# EAGLE board SlaveNode (EAGLE 9.4.2)
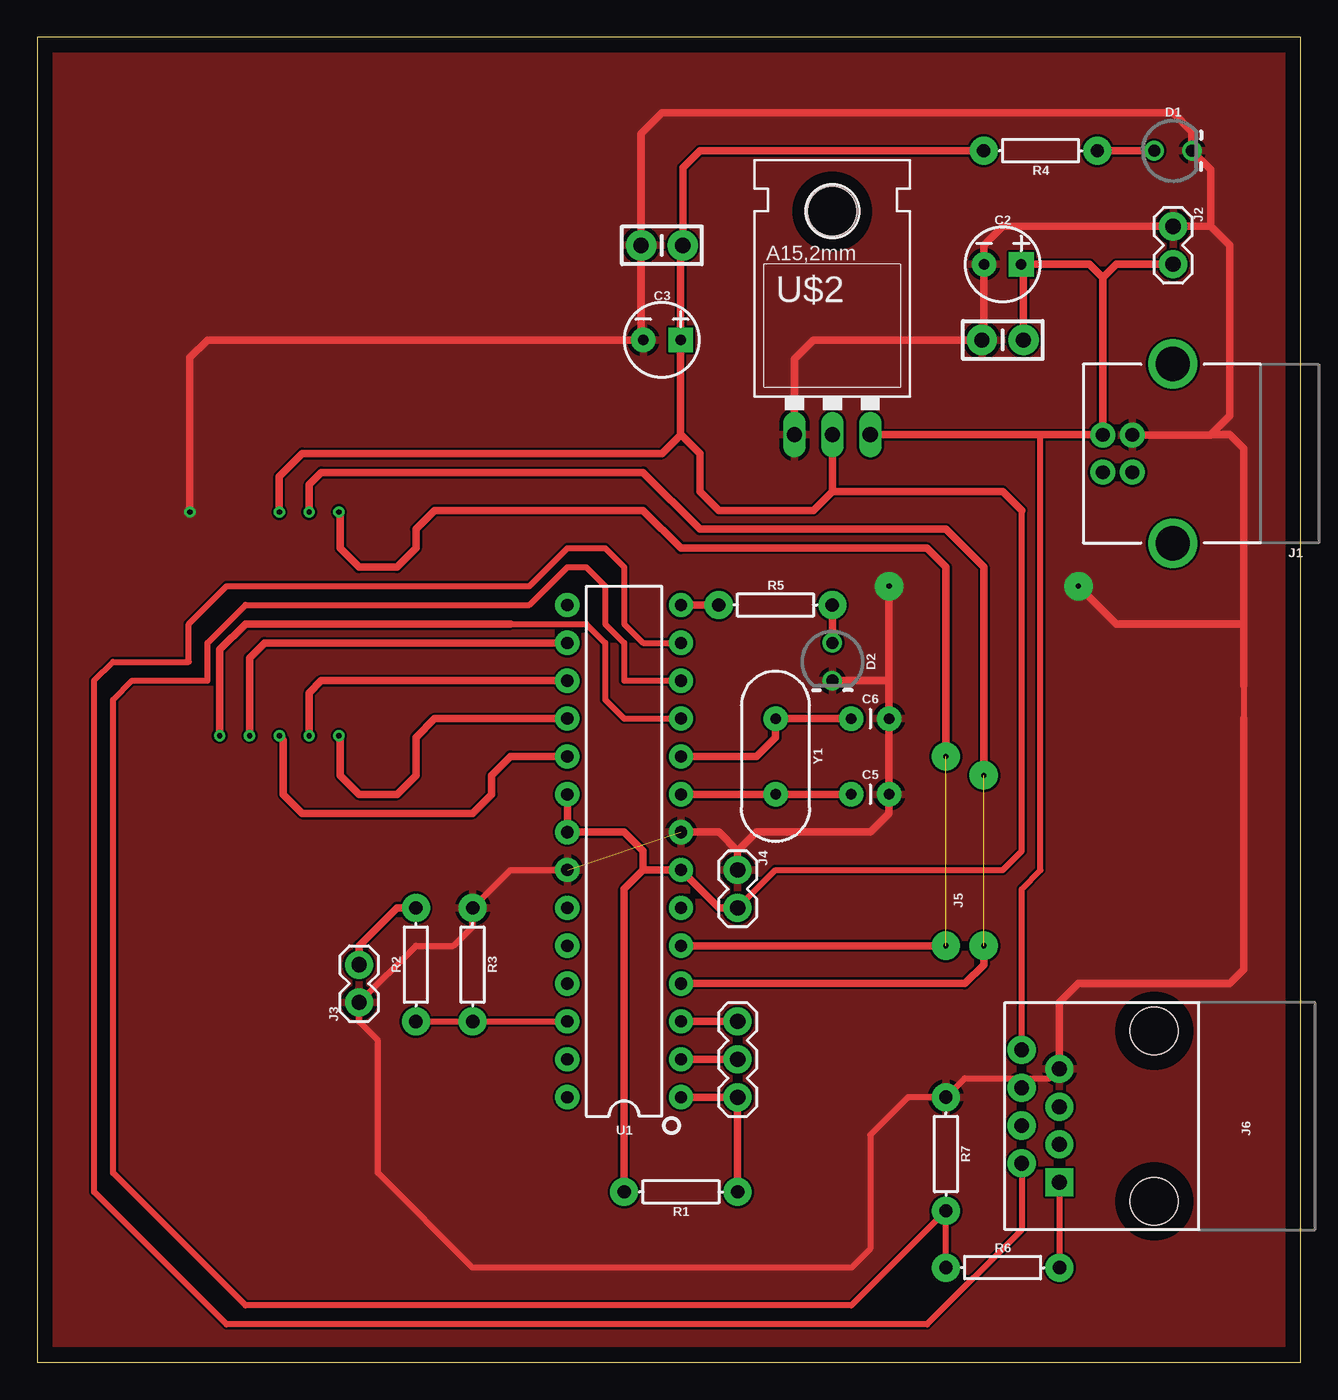
[diagram p0: board, top side]
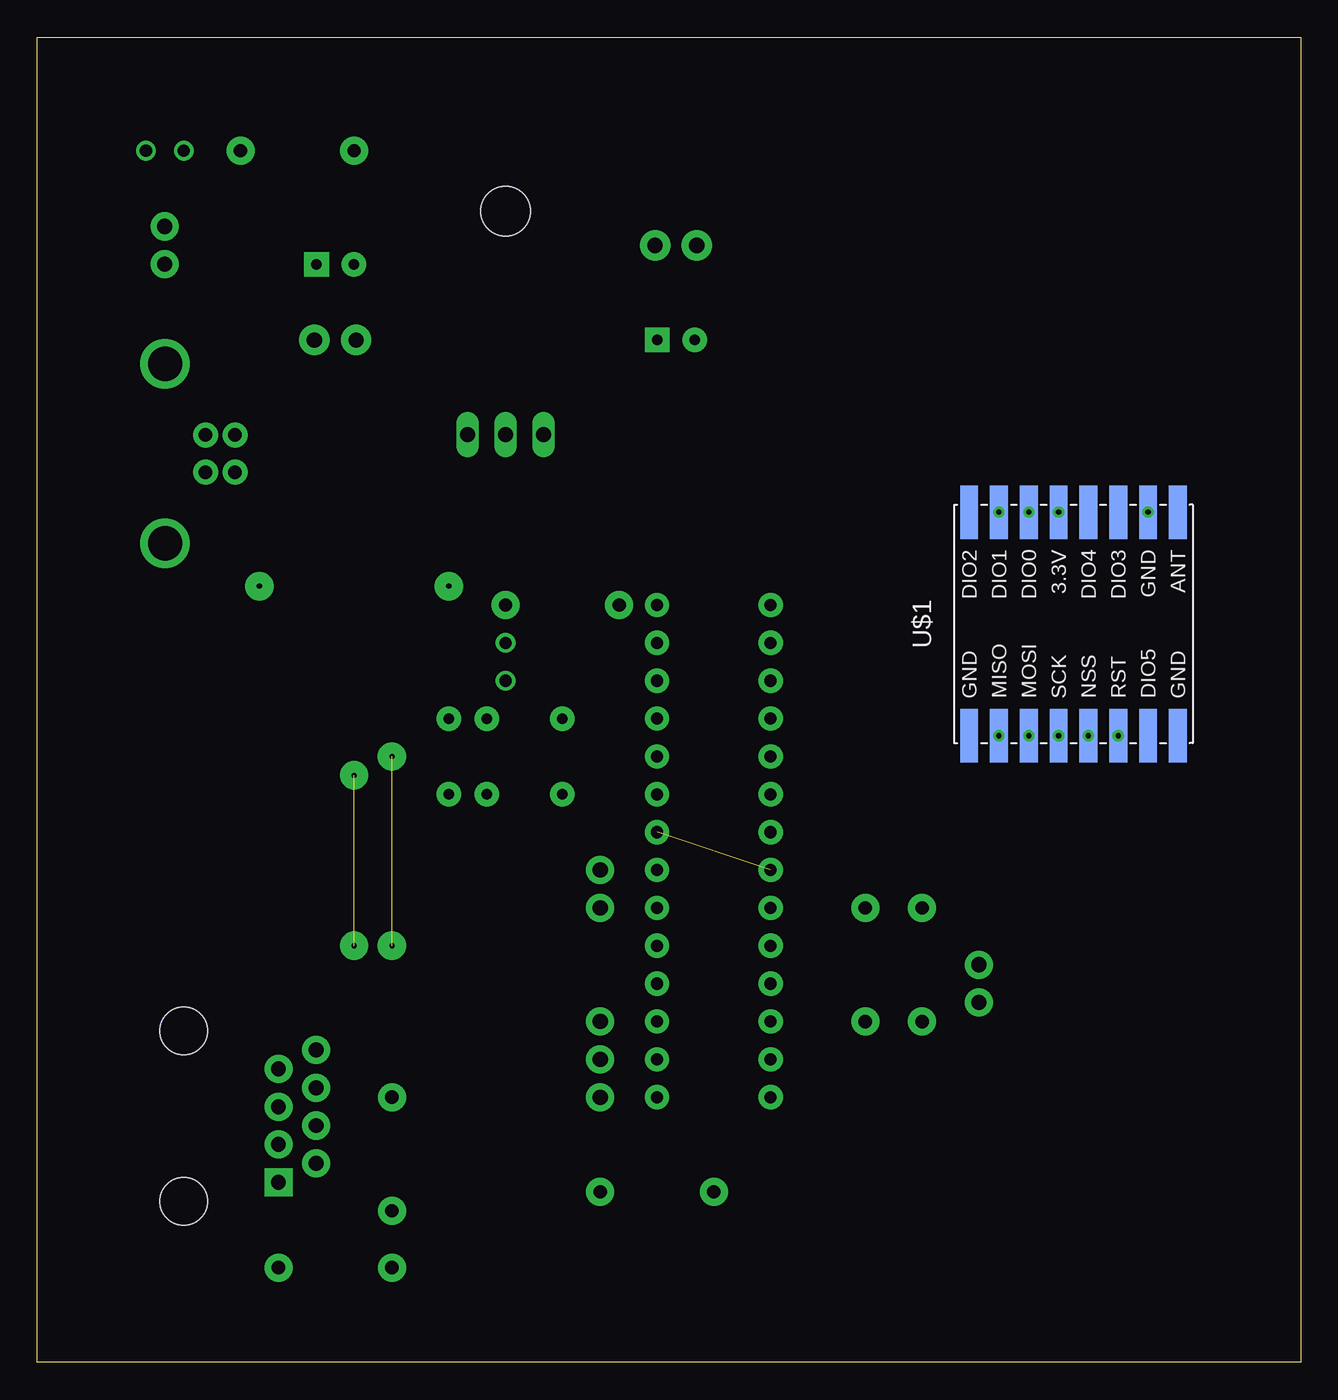
[diagram p1: board, bottom side, seen from below]

Size 84.76 x 88.89 mm. Coordinates in mm from the lower left corner, seen from the top.
Outline: 0,0 84.76,0 84.76,88.89 0,88.89 0,0
Copper layers (1*16): Top 0.035mm / dielectric 1.5mm / Bottom 0.035mm
Design rules "default": minimum track width 6mil, minimum drill 0.35mm, track to track 6mil, track to pad 6mil, pad to pad 6mil, via to via 6mil, smd to smd 6mil, copper to edge 40mil, drill to drill 6mil, minimum pad ring 10mil, minimum via ring 8mil, stop-mask expansion 4mil, vias tented up to drill 0mil, thermal gap 10mil

## Footprints (pad centres in the part's own frame; a part is rotated, then mirrored left to right if it is on the bottom)
CAP-PTH-SMALL-KIT = drill 1.016 pad 2.032: 1 -1.397,0; 2 1.397,0
CPOL-RADIAL-2.5MM-5MM = drill 0.7 pad 1.651 square: 1 1.25,0 | drill 0.7 pad 1.651: 2 -1.25,0
CAP-PTH-2.54 = drill 0.7 pad 1.651: 1 -1.27,0; 2 1.27,0
LED_3MM-NS = drill 0.813: A -1.27,0; K 1.27,0
USB-B-PTH = drill 0.914 pad 1.676: D+ 4,1.25; D- 5.981,1.25; GND 4,-1.25; VBUS 5.981,-1.25 | drill 2.286: SHLD1 1.282,-6.02; SHLD2 1.282,6.02
1X02 = drill 1.016 pad 1.88: 1 0,0; 2 2.54,0
1X03 = drill 1.016 pad 1.88: 1 0,0; 2 2.54,0; 3 5.08,0
RJ45-8 = drill 1 pad 1.88 square: 1 -4.445,6.35 | drill 1 pad 1.88: 2 -3.175,8.89; 3 -1.905,6.35; 4 -0.635,8.89; 5 0.635,6.35; 6 1.905,8.89; 7 3.175,6.35; 8 4.445,8.89 | hole 3.2: -5.715,0; 5.715,0
AXIAL-0.3 = drill 0.9 pad 1.88: P$1 -3.81,0; P$2 3.81,0
DIP28 = drill 0.813 pad 1.626: 1 -16.51,-3.81; 2 -13.97,-3.81; 3 -11.43,-3.81; 4 -8.89,-3.81; 5 -6.35,-3.81; 6 -3.81,-3.81; 7 -1.27,-3.81; 8 1.27,-3.81; 9 3.81,-3.81; 10 6.35,-3.81; 11 8.89,-3.81; 12 11.43,-3.81; 13 13.97,-3.81; 14 16.51,-3.81; 15 16.51,3.81; 16 13.97,3.81; 17 11.43,3.81; 18 8.89,3.81; 19 6.35,3.81; 20 3.81,3.81; 21 1.27,3.81; 22 -1.27,3.81; 23 -3.81,3.81; 24 -6.35,3.81; 25 -8.89,3.81; 26 -11.43,3.81; 27 -13.97,3.81; 28 -16.51,3.81
WIRELESS-LORA-RFM95W#SMD = smd 3.6 x 1.2: A1 -7.5,7; A2 -7.5,5; A3 -7.5,3; A4 -7.5,1; A5 -7.5,-1; A6 -7.5,-3; A7 -7.5,-5; A8 -7.5,-7; B1 7.5,7; B2 7.5,5; B3 7.5,3; B4 7.5,1; B5 7.5,-1; B6 7.5,-3; B7 7.5,-5; B8 7.5,-7
78XXL = drill 1.016 long: GND 0,-3.81; IN -2.54,-3.81; OUT 2.54,-3.81 | hole 3.302: 0,11.176
HC49US = drill 0.7 pad 1.651: 1 -2.54,0; 2 2.54,0

## Placement (x,y rotation side)
C1  0.1uF  [CAP-PTH-SMALL-KIT]  64.77,68.58 180 top
C2  10uF  [CPOL-RADIAL-2.5MM-5MM]  64.77,73.66 0 top
C3  10uF  [CPOL-RADIAL-2.5MM-5MM]  41.91,68.58 0 top
C4  0.1uF  [CAP-PTH-SMALL-KIT]  41.91,74.93 180 top
C5  22pF  [CAP-PTH-2.54]  55.88,38.1 0 top
C6  22pF  [CAP-PTH-2.54]  55.88,43.18 0 top
D1  [LED_3MM-NS]  76.2,81.28 0 top
D2  [LED_3MM-NS]  53.34,46.99 270 top
J1  USB_B_PTH  [USB-B-PTH]  77.47,60.96 180 top
J2  [1X02]  76.2,76.2 270 top
J3  [1X02]  21.59,24.13 90 top
J4  [1X02]  46.99,33.02 270 top
J5  [1X03]  46.99,17.78 90 top
J6  RJ45  [RJ45-8]  74.93,16.51 90 top
R1  10k  [AXIAL-0.3]  43.18,11.43 180 top
R2  100k  [AXIAL-0.3]  25.4,26.67 90 top
R3  18k  [AXIAL-0.3]  29.21,26.67 270 top
R4  1k  [AXIAL-0.3]  67.31,81.28 180 top
R5  1k  [AXIAL-0.3]  49.53,50.8 0 top
R6  1k  [AXIAL-0.3]  64.77,6.35 0 top
R7  2k  [AXIAL-0.3]  60.96,13.97 270 top
U1  328P  [DIP28]  39.37,34.29 90 top
U$1  WIRELESS-LORA-RFM95W#SMD  [WIRELESS-LORA-RFM95W#SMD]  15.24,49.53 90 bottom
U$2  V_REG_LD1117VXX  [78XXL]  53.34,66.04 0 top
Y1  16MHz  [HC49US]  49.53,40.64 270 top

## Library data of the parts
C1 C4 = SparkFun-Capacitors; PROD_ID: CAP-08370
C2 C3 = SparkFun-Capacitors; PROD_ID: CAP-08440
C5 C6 = SparkFun-Capacitors; PROD_ID: CAP-09128
D1 D2 = SparkFun-LED
J1 = SparkFun-Connectors; PROD_ID: CONN-08278; SF_ID: PRT-00139
J2-J5 = SparkFun-Connectors
J6 = SparkFun-Connectors; PROD_ID: CONN-08506; SF_ID: PRT-00643
R1 = SparkFun-Resistors; PROD_ID: RES-12183
R2 R3 R6 R7 = SparkFun-Resistors; PROD_ID: RES-12184
R4 R5 = SparkFun-Resistors; PROD_ID: RES-12182
U1 = SparkFun-IC-Microcontroller; PROD_ID: IC-09136
U$1 = diy-modules
U$2 = SparkFun-IC-Power
Y1 = SparkFun-Clocks; PROD_ID: XTAL-08181; SF_ID: COM-00536

## Nets
+3V3: C3.1 C4.1 J4.2 R1.P$2 R4.P$2 U1.7 U1.20 U1.21 U$1.B4 U$2.GND
+5V: C1.1 C2.1 J1.VBUS J2.2 J6.8 U$2.OUT
+12V: J3.2 R2.P$2
GND: C1.2 C2.2 C3.2 C4.2 C5.2 C6.2 D1.K D2.K J1.GND J2.1 J3.1 J4.1 J6.7 R3.P$1 R7.P$1 U1.8 U1.22 U$1.B7 U$2.IN
GND.1: U$1.A1
GND.2: U$1.A8
N$1: R2.P$1 R3.P$2 U1.26
N$2: D1.A R4.P$1
N$3: J5.1 R1.P$1 U1.1
N$4: U1.19 U$1.A4
N$5: U1.18 U$1.A2
N$6: C5.1 U1.9 Y1.2
N$7: C6.1 U1.10 Y1.1
N$8: J5.2 U1.2
N$9: J5.3 U1.3
N$10: U1.17 U$1.A3
N$11: U1.16 U$1.A5
N$12: U1.11 U$1.A6
N$13: U1.4 U$1.B3
N$14: U1.5 U$1.B2
N$15: J6.2 U1.13
N$16: R6.P$1 R7.P$2 U1.12
N$22: R5.P$1 U1.14
N$23: D2.A R5.P$2
N$24: J6.1 R6.P$2

## Tracks (layer width: path | path; a pad name or v marks a point on that pad's centre or on a via)
+3V3  (via drill 0.35)
  Top 0.406: J4.2 49.53,33.02 64.77,33.02 66.04,34.29 66.04,57.15
  Top 0.508: R4.P$2 44.45,81.28 43.31,80.14 C4.1 43.16,74.78 C3.1 43.16,62.21 | R1.P$2 39.37,31.75 40.64,33.02 | 40.64,33.02 U1.7 45.72,30.48 J4.2 | U1.20 U1.21 39.37,35.56 40.64,34.29 40.64,33.02 | U$2.GND 53.34,58.42 | U$1.B4 16.24,59.42 17.78,60.96 41.91,60.96 43.16,62.21 | 43.16,62.21 43.18,62.23 44.45,60.96 44.45,58.42 45.72,57.15 52.07,57.15 53.34,58.42 | 66.04,57.15 64.77,58.42 53.34,58.42
  other vias: 16.24,57.03
+5V
  Top 0.406: 67.31,62.23 67.31,33.02 66.04,31.75 J6.8
  Top 0.508: 71.49,72.76 J1.VBUS 71.47,62.23 67.31,62.23 U$2.OUT | 71.49,72.76 72.39,73.66 J2.2 | C1.1 66.17,73.51 C2.1 70.59,73.66 71.49,72.76
+12V
  Top 0.508: R2.P$2 24.13,30.48 21.59,27.94 J3.2
GND  (via drill 0.35, 0.35 pad 1.91)  (1 unrouted)
  Top 0.406: 80.95,45.72 80.95,43.18 | U1.22 31.75,33.02 R3.P$1 29.21,29.21 27.94,27.94 25.4,27.94 J3.1 21.59,22.86 22.86,21.59 22.86,12.7 29.21,6.35 54.61,6.35 55.88,7.62 55.88,15.24 58.42,17.78 R7.P$1 62.23,19.05 67.94,19.05 J6.7
  Top 0.508: U$1.B7 10.24,67.39 11.43,68.58 C3.2 40.51,68.73 C4.2 40.51,82.42 41.91,83.82 76.2,83.82 77.47,82.55 D1.K 78.74,80.01 78.74,76.2 | 78.74,76.2 J2.1 64.77,76.2 63.52,74.95 C2.2 63.52,68.73 C1.2 52.07,68.58 50.8,67.31 U$2.IN | 78.74,76.2 80.01,74.93 80.01,63.5 78.74,62.23 | J1.GND 78.72,62.21 78.74,62.23 | J4.1 46.99,34.29 | 46.99,34.29 48.26,35.56 55.88,35.56 57.15,36.83 C5.2 C6.2 57.15,45.72 | U1.8 45.72,35.56 46.99,34.29 | J6.7 68.58,24.13 69.85,25.4 80.01,25.4 80.95,26.34 80.95,43.18 | 78.74,62.23 80.01,62.23 80.95,61.29 80.95,49.53 | 80.95,45.39 80.95,45.72 80.95,49.53 | 80.95,49.53 72.39,49.53 v69.85,52.07 | 57.15,45.72 v57.15,52.07 | D2.K 57.15,45.72
  other vias: 10.24,57.03
  pour Top: 0,88.9 85.09,88.9 85.09,0 0,0
N$1
  Top 0.406: 34.29,22.86 U1.26 R3.P$2 R2.P$1
N$2
  Top 0.508: R4.P$1 D1.A
N$3
  Top 0.508: U1.1 J5.1 R1.P$1
N$4  (via drill 0.35)
  Top 0.508: U$1.A4 16.51,41.76 16.51,38.1 17.78,36.83 29.21,36.83 30.48,38.1 30.48,39.37 31.75,40.64 U1.19
  other vias: 16.24,42.03
N$5  (via drill 0.35)
  Top 0.508: U$1.A2 20.32,41.95 20.32,39.37 21.59,38.1 24.13,38.1 25.4,39.37 25.4,41.91 26.67,43.18 U1.18
  other vias: 20.24,42.03
N$6
  Top 0.508: U1.9 Y1.2 C5.1
N$7
  Top 0.508: U1.10 48.26,40.64 49.53,41.91 Y1.1 C6.1
N$8
  Top 0.508: U1.2 J5.2
N$9
  Top 0.508: U1.3 J5.3
N$10  (via drill 0.35)
  Top 0.508: U$1.A3 18.24,44.91 19.05,45.72 U1.17
  other vias: 18.24,42.03
N$11  (via drill 0.35)
  Top 0.508: U$1.A5 14.24,47.26 15.24,48.26 U1.16
  other vias: 14.24,42.03
N$12  (via drill 0.35)
  Top 0.406: 31.75,49.53 36.83,49.53 38.1,48.26 38.1,44.45 39.37,43.18 U1.11
  Top 0.508: U$1.A6 12.24,47.8 13.97,49.53 31.75,49.53
  other vias: 12.24,42.03
N$13  (via drill 0.35, 0.35 pad 1.91)  (1 unrouted)
  Top 0.508: U$1.B3 18.24,58.88 19.05,59.69 40.64,59.69 44.45,55.88 60.96,55.88 63.5,53.34 v63.5,39.37 | v63.5,27.94 63.5,26.67 62.23,25.4 U1.4
  other vias: 18.24,57.03
N$14  (via drill 0.35, 0.35 pad 1.91)  (1 unrouted)
  Top 0.508: U$1.B2 20.32,56.95 20.32,54.61 21.59,53.34 24.13,53.34 25.4,54.61 25.4,55.88 26.67,57.15 40.64,57.15 43.18,54.61 59.69,54.61 60.96,53.34 v60.96,40.64 | v60.96,27.94 U1.5
  other vias: 20.24,57.03
N$15
  Top 0.406: J6.2 66.04,8.89 59.69,2.54 12.7,2.54 3.81,11.43 3.81,45.72 5.08,46.99 10.16,46.99 10.16,49.53 12.7,52.07 33.02,52.07 35.56,54.61 38.1,54.61 39.37,53.34 39.37,49.53 40.64,48.26 U1.13
N$16
  Top 0.406: R6.P$1 R7.P$2 54.61,3.81 13.97,3.81 5.08,12.7 5.08,44.45 6.35,45.72 11.43,45.72 11.43,48.26 13.97,50.8 33.02,50.8 35.56,53.34 36.83,53.34 38.1,52.07 38.1,49.53 39.37,48.26 39.37,45.72 U1.12
N$22
  Top 0.508: U1.14 R5.P$1
N$23
  Top 0.508: R5.P$2 D2.A
N$24
  Top 0.406: J6.1 R6.P$2